# Altium PCB Motion_Board_V2_PCB.PcbDoc (part 2 of 2)
Units mm, origin at the board's own origin, x right, y up, seen from the top; angles counter-clockwise.
Board outline 65.25 x 59.75 mm, 4 copper layers (Top Layer, GND, PWR, Bottom Layer), stack 0.603 mm thick; 136 components, 74 nets, 414 pads, 822 vias.
Unrouted connection lines stored in the file: 41.
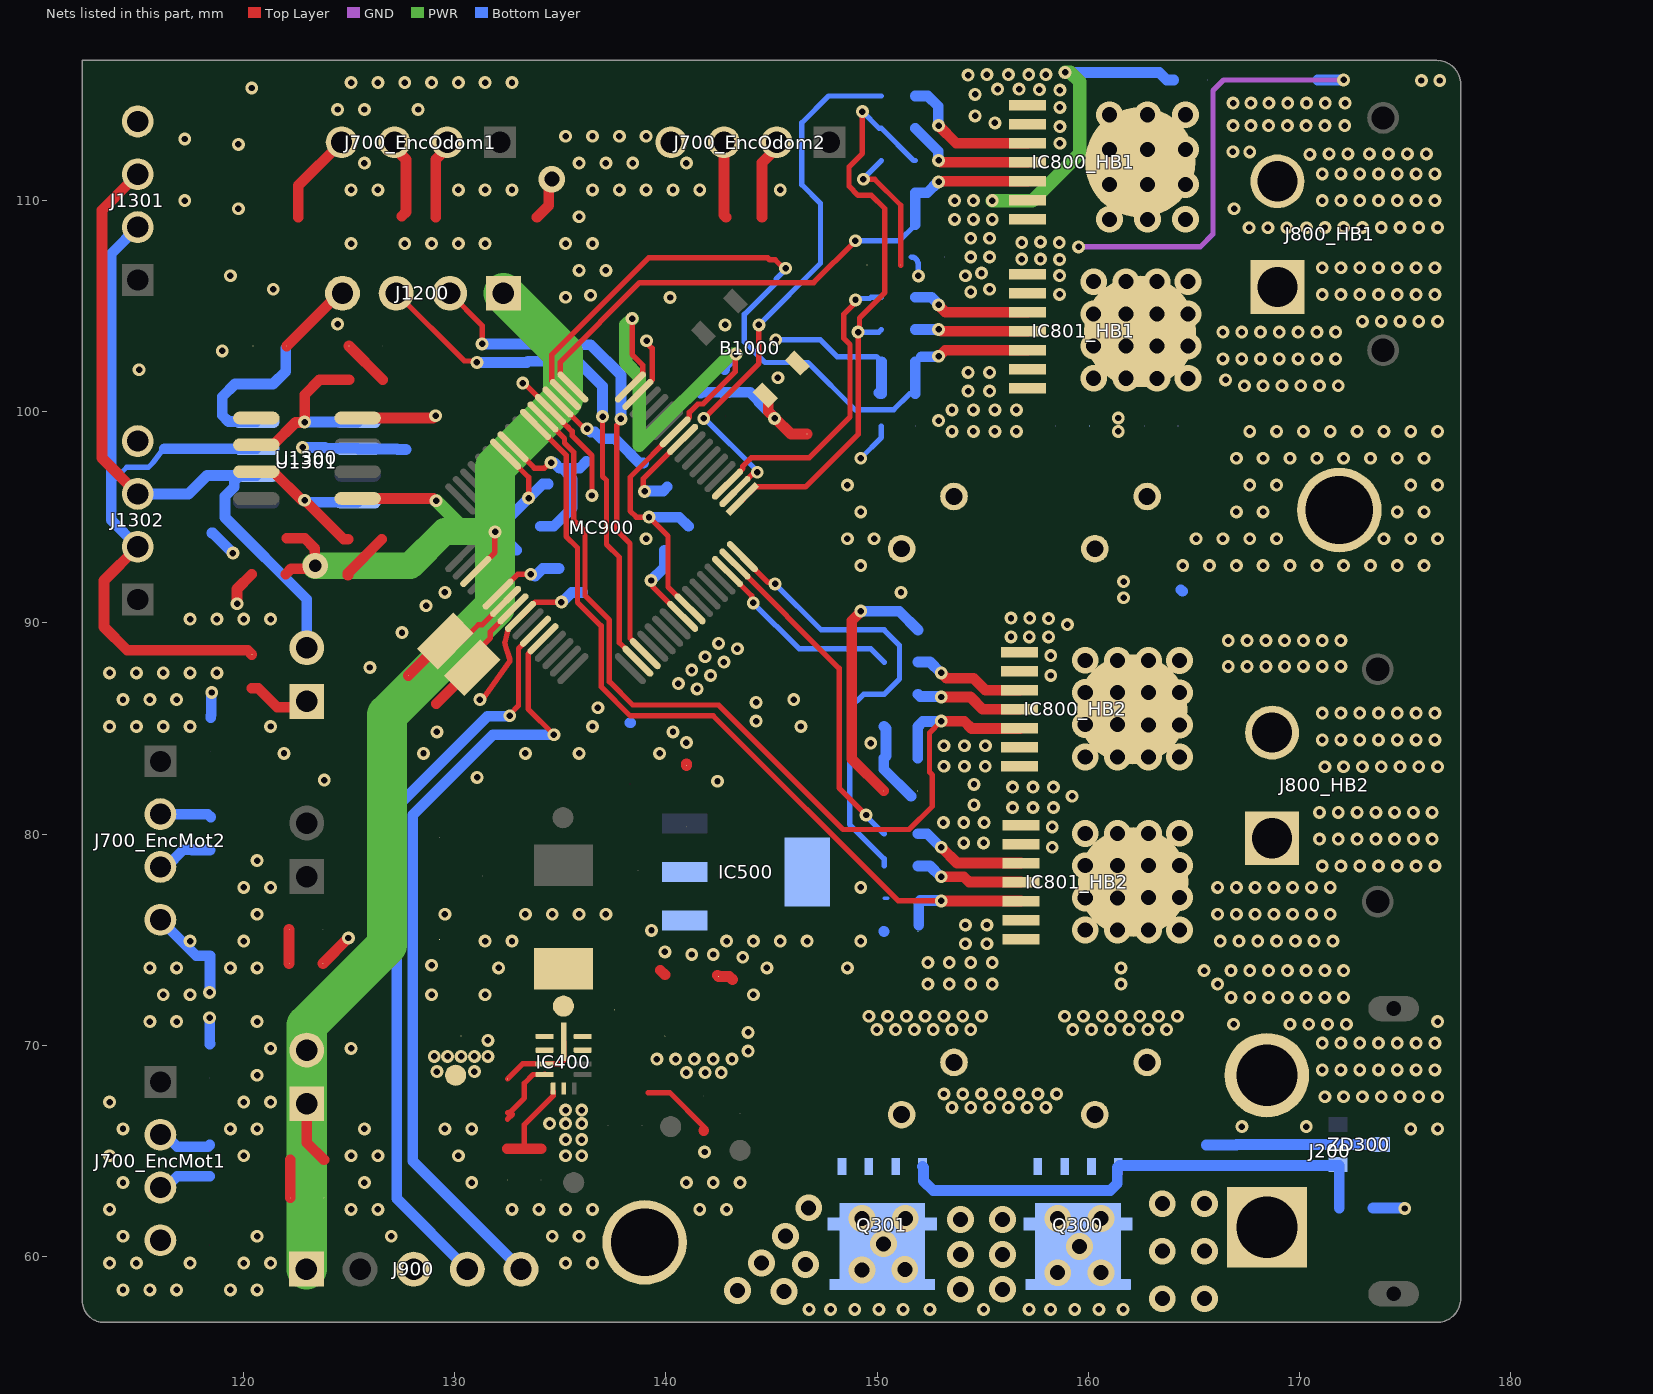
[diagram p4: the nets of this part, all layers, seen from the top]

## Via types
v1: diameter 0.61, hole 0.305, Top Layer to Bottom Layer, tented both sides, 415 vias
v2: diameter 0.61, hole 0.305, Top Layer to Bottom Layer, 281 vias
v3: diameter 1.27, hole 0.711, Top Layer to Bottom Layer, 84 vias
v4: diameter 0.61, hole 0.305, Top Layer to Bottom Layer, tented bottom, 20 vias
v5: diameter 0.61, hole 0.305, Top Layer to Bottom Layer, tented top, 16 vias
v6: diameter 1.27, hole 0.711, Top Layer to Bottom Layer, tented both sides, 5 vias
v7: diameter 1.219, hole 0.61, Top Layer to Bottom Layer, tented both sides, 1 vias

## Nets (pads, with @x,y where several pads share a name; then routed paths per layer and width w, separated by ;. In a path a pad name is that pad's centre, name@x,y a point inside that pad or via, vN(x,y) a via of type N, cw(c..) or ccw(c..) an arc to the next point about the centre after c; other vN are vias at no path point) (continued)
GND: B1000.3 C401.1 C402.1 C403.1 C404.1 C405.1 C406.1 C407.1 C408.1 C409.1 C410.1 C411.1 C413.1 C500.1 C501.2 C802_HB1.1 C802_HB2.1 C803_HB1.1 C803_HB2.1 C804_HB1.1 C804_HB2.1 C805_HB1.1 C805_HB2.1 C806_HB1.1 C806_HB2.1 C807_HB1.1 C807_HB2.1 C808_HB1.2 C808_HB2.2 C809_HB1.2 C809_HB2.2 C900.1 C901.1 C902.1 C903.1 C904.1 C905.1 C1000.1 C1100.2 C1101.2 C1301.1 IC400.1 IC400.6 IC400.11 IC500.1 IC800_HB1.1 IC800_HB1.2 IC800_HB2.1 IC800_HB2.2 IC801_HB1.1 IC801_HB1.2 IC801_HB2.1 IC801_HB2.2 J200.1 J700_EncMot1.4 J700_EncMot2.4 J700_EncOdom1.4 J700_EncOdom2.4 J900.3 J1200.4 LED400.2 LED500.2 LED800_HB1.2 LED800_HB2.2 MC900.9 MC900.15 MC900.20 MC900.25 MC900.41 MC900.56 pad. R300.1 R403.1 R405.1 R702_EncMot1.1 R702_EncMot2.1 R702_EncOdom1.1 R702_EncOdom2.1 R703_EncMot1.1 R703_EncMot2.1 R703_EncOdom1.1 R703_EncOdom2.1 R804_HB1.2 R804_HB2.2 R805_HB1.2 R805_HB2.2 R1305.2 U1300.4 | length 100.6
  Top Layer w0.254: v1(131.191,86.36) 131.297,86.377 131.369,86.45 132.605,88.171 132.605,88.296 132.387,88.968 132.378,89.068 132.538,89.724 MC900.41@133.118,90.304 133.134,90.304 133.807,90.977 v1(135.053,90.977) ; MC900.25@132.765,98.331 133.776,97.319 134.255,97.319 134.516,97.581 v1(134.564,97.581) ; v1(133.223,101.346) 133.285,101.346 MC900.20@134.533,100.099 134.533,100.092 135.374,99.25 135.374,99.243 135.558,99.06 135.558,98.856 136.5,97.915 v1(136.5,96.025) ; MC900.15@138.67,100.806 138.67,100.821 139.35,101.502 139.35,102.99 139.086,103.254 v1(139.086,103.35) ; v1(138.991,96.219) 138.923,96.287 138.923,96.816 MC900.9@140.791,98.684 ; R405.1@139.162,67.75 140.194,67.75 141.787,66.156 R403.1@141.787,66 141.787,65.968 ; v1(139.3,92) 139.368,91.932 139.368,91.727 MC900.56@140.791,90.304
  Top Layer w0.508: v1(119.7,90.9) 119.7,91.6 C1301.1@120.4,92.3 ; R1305.2@122.05,103.1 124.55,105.6 J1200.4@124.69,105.6 ; R703_EncOdom1.1@122.6,109.2 122.6,110.7 J700_EncOdom1.4@124.65,112.75 ; LED400.2@123.763,73.875 124.965,75.078 v1(124.972,75.078) ; U1300.4@125.409,99.696 125.411,99.698 128.97,99.698 129.073,99.8 v1(129.1,99.8) ; R702_EncOdom1.1@133.9,109.2 134.454,109.754 134.454,110.854 v6(134.6,111) ; 139.736,73.55 C402.1@139.954,73.332 ; C409.1@140.97,83.238 140.97,83.322 ; 141.787,65.968 141.795,65.961 ; 142.444,73.308 C401.1@142.494,73.258 143.001,73.258 143.151,73.108
  GND w0.254: v2(159.537,107.798) 165.298,107.798 165.9,108.4 165.9,115.2 166.397,115.697 v1(172.085,115.697)
  Bottom Layer w0.152: R805_HB2.2@150.33,76.962 150.513,76.962
  Bottom Layer w0.254: v1(145.2,103.4) 147.3,103.4 148.1,102.6 149.965,102.6 R805_HB1.2@150.203,102.362 ; v1(149.225,97.79) 150.203,98.768 C807_HB1.1@150.203,99.314 ; C806_HB1.1@151.6,107.315 cw(c151.6,106.969) 151.946,106.969 v1@151.946,106.432
  Bottom Layer w0.508: J700_EncMot2.4@116.068,75.941 117.768,74.241 R703_EncMot2.1@118.418,74.241 118.418,72.518 v1(118.4,72.5) ; v1(118.4,71.3) R702_EncMot1.1@118.4,70.05 118.418,70.068 ; R702_EncMot2.1@118.45,85.5 118.45,85.607 118.481,85.637 118.481,86.681 v1(118.5,86.7) ; C901.1@134.066,94.566 134.697,94.566 C903.1@135.566,95.434 135.566,96.807 135.481,96.891 135.481,96.93 135.092,97.319 ; v1(134.564,97.581) 134.584,97.562 134.721,97.562 134.964,97.319 135.092,97.319 ; v1(135.053,90.977) 135.08,90.977 135.537,91.434 C902.1@136.066,91.434 ; 136.234,97.634 135.919,97.319 135.092,97.319 ; C501.2@138.303,85.27 138.331,85.27 ; v1(138.991,96.219) 139.01,96.239 139.87,96.239 C905.1@140.066,96.434 ; v1(139.3,92) 139.934,92.634 C904.1@139.934,93.434 ; 150.091,100.884 150.137,100.838 C805_HB1.1@150.203,100.838 R805_HB1.2@150.203,102.362 ; 150.318,75.393 C805_HB2.1@150.323,75.387 ; R804_HB2.2@150.33,85.09 150.424,84.996 150.424,83.698 C804_HB2.1@150.317,83.591 150.317,83.071 C807_HB2.1@151.6,81.788 ; C803_HB2.1@164.376,91.567 164.451,91.492 ; C803_HB1.1@170.853,115.697 v1(172.085,115.697) ; R300.1@173.475,62.3 173.906,62.3 173.916,62.29 174.96,62.29 v1@174.975,62.275
  other v1: 114.3,58.42 115.57,58.42 116.84,58.42 119.38,58.42 120.65,58.42 113.665,59.69 114.935,59.69 117.475,59.69 120.015,59.69 121.285,59.69 135.255,59.69 136.525,59.69 114.3,60.96 120.65,60.96 127,60.96 134.62,60.96 135.89,60.96 113.665,62.23 125.095,62.23 126.365,62.23 132.715,62.23 133.985,62.23 135.255,62.23 136.525,62.23 141.605,62.23 142.875,62.23 174.979,62.271 114.3,63.5 125.73,63.5 130.81,63.5 140.97,63.5 142.24,63.5 143.51,63.5 113.665,64.77 120.015,64.77 125.095,64.77 126.365,64.77 130.175,64.77 135.255,64.77 136.017,64.77 141.834,64.948 135.255,65.532 136.017,65.532 114.3,66.04 119.38,66.04 120.65,66.04 125.73,66.04 129.54,66.04 130.81,66.04 175.26,66.04 176.53,66.04 134.493,66.294 135.255,66.294 136.017,66.294 135.255,66.929 136.017,66.929 113.665,67.31 120.015,67.31 121.285,67.31 120.65,68.58 121.285,69.85 125.095,69.85 166.878,70.993 115.57,71.12 116.84,71.12 120.65,71.12 176.53,71.12 166.751,72.263 116.205,72.39 117.475,72.39 128.905,72.39 131.445,72.39 144.145,72.39 115.57,73.66 116.84,73.66 119.38,73.66 120.65,73.66 132.08,73.66 144.78,73.66 148.59,73.66 128.905,73.787 143.637,74.168 141.224,74.295 142.24,74.295 139.954,74.422 117.475,74.93 120.015,74.93 131.445,74.93 132.715,74.93 142.875,74.93 144.145,74.93 145.415,74.93 146.685,74.93 149.225,74.93 139.319,75.438 120.65,76.2 129.54,76.2 133.35,76.2 134.62,76.2 135.89,76.2 137.16,76.2 120.015,77.47 121.285,77.47 149.225,77.47 120.65,78.74 142.443,82.499 123.825,82.55 131.064,82.677 121.92,83.82 128.524,83.82 133.35,83.82 135.89,83.82 139.7,83.82 149.7,84.3 140.97,84.328 129.159,84.836 140.335,84.836 113.665,85.09 114.935,85.09 116.205,85.09 117.475,85.09 121.285,85.09 136.525,85.09 146.389,85.09 136.779,85.979 114.3,86.36 115.57,86.36 116.84,86.36 146.05,86.36 113.665,87.63 114.935,87.63 116.205,87.63 117.475,87.63 118.745,87.63 125.984,87.884 127.508,89.535 117.475,90.17 118.745,90.17 120.015,90.17 121.285,90.17 128.651,90.805 129.54,91.44 151.13,91.44 149.225,92.71 164.465,92.71 165.735,92.71 167.005,92.71 168.275,92.71 169.545,92.71 170.815,92.71 172.085,92.71 173.355,92.71 174.625,92.71 175.895,92.71 139.065,93.98 148.59,93.98 149.86,93.98 165.1,93.98 166.37,93.98 167.64,93.98 168.91,93.98 173.99,93.98 175.26,93.98 176.53,93.98 149.225,95.25 167.005,95.25 168.275,95.25 174.625,95.25 175.895,95.25 148.59,96.52 167.64,96.52 168.91,96.52 175.26,96.52 176.53,96.52 167.005,97.79 168.275,97.79 169.545,97.79 170.815,97.79 172.085,97.79 173.355,97.79 174.625,97.79 175.895,97.79 167.64,99.06 168.91,99.06 170.18,99.06 171.45,99.06 172.72,99.06 173.99,99.06 175.26,99.06 176.53,99.06 145.3,101.6 142.8,104.1 124.46,104.14 135.255,105.41 140.2,105.4 136.433,105.502 151.95,106.425 135.89,106.68 137.16,106.68 125.095,107.95 127.635,107.95 128.905,107.95 130.175,107.95 131.445,107.95 135.255,107.95 136.525,107.95 135.89,109.22 125.095,110.49 126.365,110.49 130.175,110.49 131.445,110.49 132.715,110.49 136.525,110.49 137.795,110.49 139.065,110.49 140.335,110.49 141.605,110.49 145.415,110.49 125.73,111.76 135.89,111.76 137.16,111.76 138.43,111.76 140.97,111.76 135.255,113.03 136.525,113.03 137.795,113.03 139.065,113.03 124.46,114.3 125.73,114.3 128.27,114.3 125.095,115.57 126.365,115.57 127.635,115.57 128.905,115.57 130.175,115.57 131.445,115.57 132.715,115.57
  other v2: 167.264,66.152 170.312,66.152 171.196,67.564 174.752,67.564 175.641,67.564 176.53,67.564 171.069,68.834 171.958,68.834 172.847,68.834 173.736,68.834 174.625,68.834 175.514,68.834 176.403,68.834 171.069,70.104 171.958,70.104 172.847,70.104 173.736,70.104 174.625,70.104 175.514,70.104 176.403,70.104 169.545,70.993 170.434,70.993 171.323,70.993 172.212,70.993 167.64,72.263 168.529,72.263 169.418,72.263 170.307,72.263 171.196,72.263 172.085,72.263 166.116,72.898 165.481,73.533 166.751,73.533 167.64,73.533 168.529,73.533 169.418,73.533 170.307,73.533 171.196,73.533 172.085,73.533 158.293,79.375 158.293,80.34 156.413,81.255 159.233,81.788 156.413,82.22 158.217,87.503 158.217,88.443 156.337,89.332 156.337,90.221 157.226,90.221 158.638,105.547 158.638,106.436 156.845,107.213 156.845,108.001 158.648,112.7 158.648,113.487 155.575,113.665 154.635,113.995 158.648,114.402 154.635,115.011 155.702,115.265 156.718,115.265 154.305,115.926 155.194,115.951 156.21,115.951 157.175,115.951 157.988,115.951
  other v4: 172.085,67.564 172.974,67.564 173.863,67.564 159.004,89.916 158.115,90.195
  other v5: 157.378,81.255 158.344,81.255 157.378,82.22 158.344,82.22 157.201,89.332 158.115,89.332 158.638,107.198 157.734,107.213 158.623,108.001 157.734,108.026 158.649,115.214 157.683,115.24
GND_CAN: C1300.1 C1302.1 J1301.4 J1302.4 R1304.1 R1305.1 U1300.5 U1301.2 | length 6.7
  Top Layer w0.508: U1300.5@120.604,99.7 U1300.5@120.609,99.696
  Bottom Layer w0.254: J1302.4@115,98.6 J1302.4@115.224,98.824
  Bottom Layer w0.508: C1302.1@118.5,94.25 118.55,94.25 v1(119.5,93.3) ; v1(122.8,98.3) 123.867,98.3 123.905,98.262 125.391,98.262 U1301.2@125.409,98.244 125.426,98.227 127.267,98.227 127.294,98.2 C1300.1@127.7,98.2
  other v1: 115.062,101.981 118.999,102.87 121.412,105.791 119.38,106.426 119.761,109.601 117.221,109.982 119.761,112.649 117.221,112.903 120.396,115.316
HBRIN_HB1: C401.2 C402.2 C403.2 C404.2 C405.2 C800_HB1.2 C800_HB2.2 C801_HB1.2 C801_HB2.2 C806_HB1.2 C806_HB2.2 C807_HB1.2 C807_HB2.2 C808_HB1.1 C808_HB2.1 C809_HB1.1 C809_HB2.1 IC400.2 IC400.10 IC800_HB1.6 IC800_HB1.7 IC800_HB2.6 IC800_HB2.7 IC801_HB1.6 IC801_HB1.7 IC801_HB2.6 IC801_HB2.7 Q300.S Q301.S R400.2 TP402.1 ZD300.3 | length 22.9
  PWR w0.635: v2(155.448,109.982) 157.353,109.982 159.588,112.217 159.588,115.612 159.147,116.053 v1(158.902,116.053)
  Bottom Layer w0.508: v1(158.902,116.053) 163.355,116.053 163.711,115.697 C801_HB1.2@164.046,115.697 ; 165.583,65.278 167.005,65.278 167.027,65.3 ZD300.3@173.825,65.3
  other v1: 153.543,67.056 154.432,67.056 155.321,67.056 156.21,67.056 157.099,67.056 157.988,67.056 153.162,67.691 154.051,67.691 154.94,67.691 155.829,67.691 156.718,67.691 157.607,67.691 158.496,67.691 140.97,68.707 141.859,68.707 142.621,68.707 129.159,68.751 130.937,68.751 139.573,69.342 140.462,69.342 141.351,69.342 142.24,69.342 143.129,69.342 129.032,69.469 129.667,69.469 130.302,69.469 130.937,69.469 131.572,69.469 143.891,69.723 131.572,70.231 143.891,70.612 149.987,70.739 150.876,70.739 151.765,70.739 152.654,70.739 153.543,70.739 154.432,70.739 159.258,70.739 160.147,70.739 161.036,70.739 161.925,70.739 162.814,70.739 163.703,70.739 149.606,71.374 150.495,71.374 151.384,71.374 152.273,71.374 153.162,71.374 154.051,71.374 154.94,71.374 158.877,71.374 159.766,71.374 160.655,71.374 161.544,71.374 162.433,71.374 163.322,71.374 164.211,71.374 153.543,99.06 154.559,99.06 155.575,99.06 156.591,99.06
  other v2: 152.4,72.898 153.416,72.898 154.432,72.898 155.448,72.898 153.416,73.914 154.432,73.914 155.448,73.914 154.178,74.803 155.194,74.803 154.178,75.692 155.194,75.692 154.102,79.578 155.042,79.578 153.162,83.21 155.118,83.21 154.127,84.176 155.123,84.181 152.908,99.568 153.543,100.076 154.559,100.076 155.575,100.076 156.591,100.076 154.305,100.965 155.321,100.965 154.305,101.854 155.321,101.854 154.432,105.664 155.321,105.791 154.94,106.553 155.321,107.315 155.321,108.204 153.67,109.093 154.559,109.093 155.448,109.093 153.67,109.982 154.559,109.982
  other v4: 152.4,73.914 153.137,80.543 154.102,80.543 154.584,81.382 154.584,82.347 154.127,83.21 153.162,84.176 154.178,106.426 154.432,107.315 154.432,108.204
  other v5: 155.067,80.543
INA1: MC900.2 R800_HB1.2 | length 26
  Top Layer w0.254: v1(141.794,99.674) 144.4,102.28 v1(144.4,104.1) ; MC900.2@143.266,96.209 143.282,96.209 144.13,97.057 144.257,97.057 v1(144.325,97.125)
  Bottom Layer w0.254: v1(141.794,99.674) 141.827,99.674 144.325,97.176 v1(144.325,97.125) ; v1(144.4,104.1) 147.32,107.02 147.32,109.855 146.431,110.744 146.431,113.665 147.701,114.935 R800_HB1.2@150.203,114.935
INA2: MC900.62 R800_HB2.2 | length 9.3
  Top Layer w0.254: MC900.62@142.912,92.426 144.066,91.273 144.066,91.01 v1(144.134,90.942)
  Bottom Layer w0.254: v1(144.134,90.942) 146.302,88.773 149.695,88.773 R800_HB2.2@150.33,88.138
INB1: MC900.3 R801_HB1.2 | length 14.4
  Top Layer w0.254: MC900.3@142.912,96.563 142.912,96.579 143.642,97.309 143.642,97.412 144.044,97.814 146.788,97.814 148.717,99.743 148.717,103.17 148.412,103.475 148.412,104.597 148.971,105.156 148.971,105.278 v1(148.976,105.283)
  Bottom Layer w0.254: v1(148.976,105.283) 149.044,105.351 149.648,105.351 149.707,105.41 R801_HB1.2@150.203,105.41
INB2: MC900.63 R801_HB2.2 | length 15.7
  Top Layer w0.254: MC900.63@143.266,92.779 148.2,87.845 148.2,82.178 v1(149.479,80.899)
  Bottom Layer w0.254: v1(149.479,80.899) 149.479,80.861 R801_HB2.2@150.33,80.01
INH1: MC900.1 R802_HB1.2 R803_HB1.2 R806_HB1.1 | length 28.5
  Top Layer w0.254: MC900.1@143.62,95.856 143.661,95.856 144.242,96.437 146.612,96.437 149.098,98.923 v1(149.098,103.759) 149.166,103.827 149.166,104.431 150.368,105.633 150.368,109.601 149.733,110.236 149.098,110.236 148.666,110.668 148.666,111.582 149.3,112.216 v4(149.3,114.2)
  Bottom Layer w0.254: v1(149.098,103.759) 150.076,103.759 R803_HB1.2@150.203,103.886 ; v4(149.3,114.2) 150.089,113.411 R802_HB1.2@150.203,113.411 151.727,111.887 R806_HB1.1@151.803,111.887
INH2: MC900.64 R802_HB2.2 R803_HB2.2 R806_HB2.1 | length 21.9
  Top Layer w0.254: MC900.64@143.62,93.133 144.84,91.912 145.103,91.912 v1(145.171,91.844)
  Bottom Layer w0.254: v1(145.171,91.844) 147.353,89.662 R806_HB2.1@150.33,89.662 151.059,88.933 151.059,87.343 R802_HB2.2@150.33,86.614 149.352,86.614 148.7,85.962 148.7,80.455 150.33,78.825 R803_HB2.2@150.33,78.486
ISA1: C804_HB1.2 IC800_HB1.5 MC900.17 R804_HB1.1 | length 28
  Top Layer w0.254: MC900.17@135.593,101.159 135.001,101.751 135.001,102.275 135.001,102.345 138.757,106.1 146.994,106.1 148.971,108.077 v1(148.971,108.082)
  Top Layer w0.508: v1(152.908,110.871) 152.937,110.9 IC800_HB1.5@157.129,110.9
  Bottom Layer w0.254: v1(148.971,108.082) 148.976,108.077 151.041,108.077 C804_HB1.2@151.803,108.839
  Bottom Layer w0.508: C804_HB1.2@151.803,108.839 R804_HB1.1@151.803,110.363 152.373,110.363 152.881,110.871 v1(152.908,110.871)
ISA2: C804_HB2.2 IC800_HB2.5 MC900.21 R804_HB2.1 | length 43.4
  Top Layer w0.254: MC900.21@134.179,99.745 135.203,98.721 135.203,98.517 135.636,98.084 135.636,94.867 136.17,94.334 136.17,91.286 137.325,90.131 137.325,87.211 138.43,86.106 142.494,86.106 148.387,80.213 151.513,80.213 152.615,81.315 152.615,82.788 152.476,82.926 152.476,84.785 v1(153.035,85.344)
  Top Layer w0.508: v1(153.035,85.344) 154.119,85.344 154.463,85 IC800_HB2.5@156.75,85
  Bottom Layer w0.508: C804_HB2.2@151.917,83.591 151.917,85.077 R804_HB2.1@151.93,85.09 152.165,85.325 153.016,85.325 v1(153.035,85.344)
ISB1: C805_HB1.2 IC801_HB1.5 MC900.18 R805_HB1.1 | length 36
  Top Layer w0.254: MC900.18@135.24,100.806 135.24,100.821 134.598,101.463 134.598,102.698 139.178,107.278 144.817,107.278 144.914,107.181 145.178,107.181 145.573,106.786 v1(145.669,106.786)
  Top Layer w0.508: v1(152.908,102.616) 152.935,102.616 153.219,102.9 IC801_HB1.5@157.129,102.9
  Bottom Layer w0.254: v1(145.669,106.786) 145.669,106.733 145.211,106.274 145.211,106.095 143.714,104.598 143.714,103.306 144.7,102.32 146.727,102.32 148.963,100.084 150.783,100.084 151.537,100.838 C805_HB1.2@151.803,100.838
  Bottom Layer w0.508: C805_HB1.2@151.803,100.838 R805_HB1.1@151.803,102.362 ; 152.099,102.597 152.889,102.597 v1(152.908,102.616)
ISB2: C805_HB2.2 IC801_HB2.5 MC900.22 R805_HB2.1 | length 40
  Top Layer w0.254: MC900.22@133.825,99.391 135.28,97.936 135.28,94.087 135.814,93.553 135.814,90.97 136.931,89.853 136.931,86.975 138.308,85.598 142.24,85.598 151.003,76.835 v1(153.035,76.835)
  Top Layer w0.508: v1(153.035,76.835) 153.045,76.825 IC801_HB2.5@156.8,76.825
  Bottom Layer w0.508: 151.968,75.692 151.968,76.785 152.038,76.854 153.016,76.854 v1(153.035,76.835)
LED3v3: C500.2 C900.2 C901.2 C902.2 C903.2 C904.2 C905.2 C1301.2 IC500.2 IC500.4 J500.1 J500.2 J900.1 J1200.1 MC900.10 MC900.16 MC900.19 MC900.26 MC900.35 MC900.38 MC900.57 R500.2 R1000.2 R1302.1 U1300.1 | length 127.4
  Top Layer w0.254: MC900.35@130.997,92.426 131.9,93.329 131.9,94.289 v1(131.911,94.3) ; MC900.38@132.058,91.365 132.993,92.3 v1(133.6,92.3) ; MC900.26@132.411,97.977 133.5,96.888 v1(133.5,95.9) ; MC900.19@134.886,100.452 136.083,99.255 136.199,99.255 v1(136.267,99.187) ; MC900.16@138.316,101.159 138.316,101.186 138.897,101.767 138.897,102.203 138.4,102.7 v1(138.4,104.4) ; MC900.10@140.438,99.022 138.305,96.889 138.305,95.295 138.6,95 v1(139.2,95) 140.1,94.1 140.1,91.703 MC900.57@141.145,90.658 ; MC900.10@140.438,99.038 140.438,99.054 141.108,99.725 141.108,99.958 141.51,100.36 141.76,100.36 143.281,101.882 143.281,102.681 v1(143.315,102.715)
  Top Layer w0.508: C1301.2@122,92.3 122.264,92.564 123.264,92.564 v7(123.4,92.7) 123.381,92.719 123.381,93.519 122.9,94 R1302.1@122.05,94 ; J500.1@123,67.23 123,65.388 R500.2@123.813,64.575 ; U1300.1@125.409,95.886 128.987,95.886 129.075,95.797 v1@129.103,95.797
  PWR w0.635: v1(129.122,95.778) 130.58,94.32 130.6,94.3 ; v1@131.891,94.32 v1(131.911,94.3) ; v1(138.4,104.4) 138.1,104.1 138.1,102.3 138.746,101.654 138.746,98.396 143.065,102.715 v1(143.315,102.715)
  PWR w1.27: v7(123.4,92.7) 127.9,92.7 129.52,94.32 130.58,94.32 v1@131.891,94.32
  PWR w1.905: J900.1@122.98,59.4 123,59.42 J500.1@123,67.23 J500.2@123,69.77 123,70.95 126.8,74.749 126.8,85.652 131.911,90.763 v1(131.911,94.3) 131.911,97.367 135.128,100.584 135.128,102.782 J1200.1@132.31,105.6
  Bottom Layer w0.508: v1(131.911,94.3) 131.911,94.311 v1(133.5,95.9) 134.166,96.566 C903.2@134.434,96.566 ; v1@132.154,94.215 C901.2@132.934,93.434 ; v1@133.8,92.2 134.166,92.566 C902.2@134.934,92.566 ; v1(136.267,99.187) 136.295,99.187 136.445,99.037 136.628,99.037 136.952,98.713 137.595,98.713 138.333,97.975 138.361,97.975 ; 138.325,97.975 138.734,97.566 C905.2@138.934,97.566 ; v1(139.2,95) 140.631,95 C904.2@141.066,94.566 ; R1000.2@142.785,101.996 142.785,102.158 143.315,102.688 v1(143.315,102.715)
  other v1: 144.272,85.344 144.272,86.233 141.478,86.868 140.589,87.122 142.113,87.503 141.224,87.757 142.748,88.138 141.859,88.392 143.383,88.773 142.494,89.027
MOTOR1_HB1: C801_HB1.1 C803_HB1.2 IC800_HB1.8 J800_HB1.N
  other v2: 167.611,108.7 168.5,108.7 169.389,108.7 170.329,108.7 171.196,108.712 172.085,108.712 172.974,108.712 173.863,108.712 174.752,108.712 175.641,108.712 176.53,108.712 166.9,109.6 171.069,109.982 171.958,109.982 172.847,109.982 173.736,109.982 174.625,109.982 175.514,109.982 176.403,109.982 171.069,111.252 171.958,111.252 172.847,111.252 173.736,111.252 174.625,111.252 175.514,111.252 176.403,111.252 170.486,112.175 171.4,112.2 172.289,112.2 173.3,112.2 174.2,112.2 175.1,112.2 176,112.2 166.84,112.3 167.64,112.293 166.853,113.538 167.691,113.538 168.529,113.538 169.418,113.538 170.307,113.538 171.196,113.538 172.136,113.538 166.853,114.605 167.691,114.605 168.547,114.6 169.436,114.6 170.325,114.6 171.214,114.6 172.154,114.6 175.768,115.672 176.632,115.672
  other v3: 161,109.1 162.8,109.1 164.6,109.1 161,110.75 162.8,110.75 164.6,110.75 161,112.4 162.8,112.4 164.6,112.4 161,114.05 162.8,114.05 164.6,114.05
MOTOR1_HB2: C801_HB2.1 C803_HB2.2 IC800_HB2.8 J800_HB2.N
  other v2: 171.196,83.185 172.085,83.185 172.974,83.185 173.863,83.185 174.752,83.185 175.641,83.185 176.53,83.185 171.069,84.455 171.958,84.455 172.847,84.455 173.736,84.455 174.625,84.455 175.514,84.455 176.403,84.455 171.069,85.725 171.958,85.725 172.847,85.725 173.736,85.725 174.625,85.725 175.514,85.725 176.403,85.725 166.624,87.935 167.513,87.935 168.402,87.935 169.291,87.935 170.18,87.935 171.069,87.935 171.958,87.935 166.624,89.154 167.513,89.154 168.402,89.154 169.291,89.154 170.18,89.154 171.069,89.154 171.958,89.154
  other v3: 159.852,83.652 161.376,83.652 162.839,83.642 164.313,83.642 159.852,85.176 161.376,85.176 162.839,85.166 164.313,85.166 159.852,86.7 161.376,86.7 162.839,86.69 164.313,86.69 159.852,88.224 161.376,88.224 162.839,88.214 164.313,88.214
  other v4: 161.671,91.186 161.671,91.948
MOTOR2_HB1: C800_HB1.1 C802_HB1.2 IC801_HB1.8 J800_HB1.P
  other v1: 161.417,99.06 161.417,99.695
  other v2: 167.386,101.219 168.275,101.219 169.164,101.219 170.053,101.219 170.942,101.219 171.831,101.219 166.5,101.5 167.259,102.489 168.148,102.489 169.037,102.489 169.926,102.489 170.815,102.489 171.704,102.489 167.259,103.759 168.148,103.759 169.037,103.759 169.926,103.759 170.815,103.759 171.704,103.759 172.974,104.267 173.863,104.267 174.752,104.267 175.641,104.267 176.53,104.267 171.069,105.537 171.958,105.537 172.847,105.537 173.736,105.537 174.625,105.537 175.514,105.537 176.403,105.537 171.069,106.807 171.958,106.807 172.847,106.807 173.736,106.807 174.625,106.807 175.514,106.807 176.403,106.807
  other v3: 160.252,101.576 161.776,101.576 163.246,101.575 164.719,101.575 160.252,103.1 161.776,103.1 163.246,103.099 164.719,103.099 160.252,104.624 161.776,104.624 163.246,104.623 164.719,104.623 160.252,106.148 161.776,106.148 163.246,106.147 164.719,106.147
  other v5: 166.37,102.489 166.37,103.759
MOTOR2_HB2: C800_HB2.1 C802_HB2.2 IC801_HB2.8 J800_HB2.P
  other v2: 166.243,74.93 167.132,74.93 168.021,74.93 168.91,74.93 169.799,74.93 170.688,74.93 171.577,74.93 166.116,76.2 167.005,76.2 167.894,76.2 168.783,76.2 169.672,76.2 170.561,76.2 171.45,76.2 167.005,77.47 167.894,77.47 168.783,77.47 169.672,77.47 170.561,77.47 171.45,77.47 171.069,78.486 171.958,78.486 172.847,78.486 173.736,78.486 174.625,78.486 175.514,78.486 176.403,78.486 170.942,79.756 171.831,79.756 172.72,79.756 173.609,79.756 174.498,79.756 175.387,79.756 176.276,79.756 170.942,81.026 171.831,81.026 172.72,81.026 173.609,81.026 174.498,81.026 175.387,81.026 176.276,81.026
  other v3: 159.852,75.452 161.376,75.452 162.839,75.463 164.313,75.463 159.852,76.976 161.376,76.976 162.839,76.987 164.313,76.987 159.852,78.5 161.376,78.5 162.839,78.511 164.313,78.511 159.852,80.024 161.376,80.024 162.839,80.035 164.313,80.035
  other v4: 161.544,72.898 161.544,73.66
  other v5: 166.116,77.47
NetB1000_1: B1000.1 C1000.2 R1000.1 R1001.2 | length 7.2
  Top Layer w0.508: B1000.1@144.707,100.773 144.707,100.672 144.849,100.531 144.849,100.004 145.15,99.702 v1(145.15,99.675) 145.177,99.675 145.918,98.934 C1000.2@146.684,98.934
  Bottom Layer w0.508: R1000.1@141.654,100.864 141.705,100.916 142.618,100.916 142.634,100.9 142.971,100.9 142.987,100.916 143.984,100.916 144.412,100.488 144.412,100.44 145.15,99.702 v1(145.15,99.675)
NetC400_1: C400.1 IC400.4 | length 3.2
  Top Layer w0.254: 132.5,66.5 132.729,66.729 ; C400.1@132.5,66.8 ccw(c132.5,67.041) 132.671,66.871 133.3,67.5 133.3,68.2 133.717,68.617 134.26,68.617 IC400.4@134.262,68.619
NetIC800_HB1_3: IC800_HB1.3 R800_HB1.1 | length 6.8
  Top Layer w0.508: v1(152.908,113.538) 153.746,112.7 IC800_HB1.3@157.129,112.7
  Bottom Layer w0.508: R800_HB1.1@151.803,114.935 152.4,114.935 152.889,114.446 152.889,113.557 v1(152.908,113.538)
NetIC800_HB1_4: IC800_HB1.4 R802_HB1.1 | length 6.2
  Top Layer w0.508: v1(152.908,111.887) 152.995,111.8 IC800_HB1.4@157.129,111.8
  Bottom Layer w0.508: R802_HB1.1@151.803,113.411 152.889,112.325 152.889,111.906 v1(152.908,111.887)
NetIC800_HB2_3: IC800_HB2.3 R800_HB2.1 | length 5.4
  Top Layer w0.508: v1(153.035,87.63) 153.289,87.376 154.559,87.376 155.135,86.8 IC800_HB2.3@156.75,86.8
  Bottom Layer w0.508: R800_HB2.1@151.93,88.138 152.5,88.138 153.008,87.63 v1(153.035,87.63)
NetIC800_HB2_4: IC800_HB2.4 R802_HB2.1 | length 5.1
  Top Layer w0.508: v1(153.035,86.487) 154.416,86.487 155.002,85.9 IC800_HB2.4@156.75,85.9
  Bottom Layer w0.508: R802_HB2.1@151.93,86.614 152.038,86.506 153.016,86.506 v1(153.035,86.487)
NetIC801_HB1_3: IC801_HB1.3 R801_HB1.1 | length 5.6
  Top Layer w0.508: v1(152.908,105.049) 152.908,105.029 153.237,104.7 IC801_HB1.3@157.129,104.7
  Bottom Layer w0.508: R801_HB1.1@151.803,105.41 152.574,105.41 152.908,105.076 v1(152.908,105.049)
NetIC801_HB1_4: IC801_HB1.4 R803_HB1.1 | length 5.4
  Top Layer w0.508: v1(152.908,103.886) 152.935,103.886 153.021,103.8 IC801_HB1.4@157.129,103.8
  Bottom Layer w0.508: R803_HB1.1@151.803,103.886 v1(152.908,103.886)
NetIC801_HB2_3: IC801_HB2.3 R801_HB2.1 | length 5.4
  Top Layer w0.508: v1@153.054,79.356 153.785,78.625 IC801_HB2.3@156.8,78.625
  Bottom Layer w0.508: R801_HB2.1@151.93,80.01 152.373,80.01 153.008,79.375 v1(153.035,79.375)
NetIC801_HB2_4: IC801_HB2.4 R803_HB2.1 | length 5.2
  Top Layer w0.508: v1(153.035,77.978) 154.103,77.978 154.356,77.725 IC801_HB2.4@156.8,77.725
  Bottom Layer w0.508: R803_HB2.1@151.93,78.486 152.5,78.486 153.008,77.978 v1(153.035,77.978)
NetJ200_2: J200.2 Q300.D Q301.D
  other v2: 146.782,57.492 147.798,57.492 148.941,57.492 150.084,57.492 151.227,57.492 152.497,57.492 155.037,57.492 157.196,57.492 158.212,57.492 159.355,57.492 160.498,57.492 161.641,57.492
  other v3: 165.5,58 145.593,58.344 143.39,58.384 153.949,58.445 155.931,58.445 158.547,59.233 160.604,59.233 149.276,59.36 151.308,59.385 146.609,59.614 144.526,59.69 153.949,60.096 155.931,60.096 159.577,60.472 150.306,60.599 145.669,60.96 153.949,61.747 155.931,61.747 149.276,61.798 151.333,61.798 158.547,61.798 160.604,61.798 146.761,62.306 165.5,62.5
  other v6: 163.5,58 163.5,60.25 165.5,60.25 163.5,62.5
NetJ700_EncMot1_2: J700_EncMot1.2 R700_EncMot1.2 | length 2.6
  Bottom Layer w0.508: J700_EncMot1.2@116.068,65.766 116.3,65.766 116.866,65.2 118.325,65.2 R700_EncMot1.2@118.4,65.275
NetJ700_EncMot1_3: J700_EncMot1.3 R701_EncMot1.2 | length 2.6
  Bottom Layer w0.508: J700_EncMot1.3@116.068,63.266 116.332,63.266 116.866,63.8 118.4,63.8
NetJ700_EncMot2_2: J700_EncMot2.2 R700_EncMot2.2 | length 2.4
  Bottom Layer w0.508: J700_EncMot2.2@116.068,80.941 118.309,80.941 R700_EncMot2.2@118.45,80.8
NetJ700_EncMot2_3: J700_EncMot2.3 R701_EncMot2.2 | length 2.7
  Bottom Layer w0.508: J700_EncMot2.3@116.068,78.441 116.339,78.441 117.147,79.25 117.575,79.25 117.584,79.241 R701_EncMot2.2@118.418,79.241
NetJ700_EncOdom1_2: J700_EncOdom1.2 R700_EncOdom1.2 | length 3.8
  Top Layer w0.508: R700_EncOdom1.2@129.1,109.2 129.1,111.929 129.65,112.479 J700_EncOdom1.2@129.65,112.75
NetJ700_EncOdom1_3: J700_EncOdom1.3 R701_EncOdom1.2 | length 3.8
  Top Layer w0.508: J700_EncOdom1.3@127.15,112.75 127.15,112.479 127.7,111.929 127.7,109.45 127.5,109.25
NetJ700_EncOdom2_2: J700_EncOdom2.2 R700_EncOdom2.2 | length 3.8
  Top Layer w0.508: R700_EncOdom2.2@144.55,109.2 144.55,111.779 145.25,112.479 J700_EncOdom2.2@145.25,112.75
NetJ700_EncOdom2_3: J700_EncOdom2.3 R701_EncOdom2.2 | length 3.6
  Top Layer w0.508: J700_EncOdom2.3@142.75,112.75 142.75,109.3 R701_EncOdom2.2@142.85,109.2
NetJ1300_1: J1300.1 R1303.2 | length 3.1
  Top Layer w0.508: R1303.2@120.4,86.9 120.7,86.9 121.6,86 122.72,86 J1300.1@123,86.28
NetJ1300_2: J1300.2 J1301.3 J1302.3 U1301.6 | length 33.3
  Top Layer w0.508: J1302.3@115,96.1 113.3,97.8 113.3,109.532 J1301.3@115,111.232
  Bottom Layer w0.508: J1302.3@115,96.1 117.4,96.1 118.274,96.974 U1301.6@120.609,96.974 119.834,96.974 119.571,96.711 119.571,96.429 119.128,95.986 119.128,94.987 123,91.114 J1300.2@123,88.82
NetJ1301_2: J1301.2 J1302.2 R1303.1 U1301.7 | length 36
  Top Layer w0.508: J1302.2@114.809,93.791 J1302.2@115,93.6 113.4,92 113.4,89.8 114.5,88.7 120.2,88.7 R1303.1@120.4,88.5
  Bottom Layer w0.254: 113.738,96.623 114.477,97.362 115.498,97.362 115.73,97.594 115.756,97.625 116.149,98.169 116.163,98.183 116.224,98.244 116.262,98.244
  Bottom Layer w0.508: J1302.2@115,93.6 113.738,94.862 113.738,96.623 113.738,107.47 J1301.2@115,108.732 ; 116.262,98.244 U1301.7@120.609,98.244
NetLED400_1: LED400.1 R402.1 | length 1.6
  Top Layer w0.508: LED400.1@122.163,73.875 R402.1@122.163,75.475
NetLED500_1: LED500.1 R500.1 | length 1.8
  Top Layer w0.508: LED500.1@122.213,62.775 R500.1@122.213,64.575
NetLED800_HB1_1: LED800_HB1.1 R806_HB1.2 | length 6.3
  Top Layer w0.254: v1(149.352,110.998) 149.885,110.998 151.118,109.765 LED800_HB1.1@151.118,106.934
  Bottom Layer w0.254: v1(149.352,110.998) 149.352,111.036 R806_HB1.2@150.203,111.887
NetLED800_HB2_1: LED800_HB2.1 R806_HB2.2 | length 12.4
  Top Layer w0.508: v1(149.225,90.551) 149.225,90.524 148.8,90.099 148.8,83.553 LED800_HB2.1@150.311,82.042
  Bottom Layer w0.508: v1(149.225,90.551) 151.041,90.551 R806_HB2.2@151.93,89.662
NetQ300_G: Q300.G Q301.G R300.2 ZD300.1 | length 23.5
  Bottom Layer w0.508: Q301.G@152.146,64.259 152.195,64.21 152.195,63.578 152.654,63.119 161.036,63.119 161.368,63.451 161.368,64.21 Q300.G@161.417,64.259 161.462,64.305 171.87,64.305 171.875,64.3 R300.2@171.875,62.3
NetR1300_1: R1300.1 TXCAN.1 | length 2.3
  Top Layer w0.508: R1300.1@125,103.1 TXCAN.1@126.6,101.5
NetR1301_1: R1301.1 RXCAN.1 | length 2.4
  Top Layer w0.508: R1301.1@124.95,92.25 124.95,92.35 RXCAN.1@126.55,93.95
NetR1304_2: R1304.2 U1301.8 | length 7.2
  Bottom Layer w0.508: U1301.8@120.609,99.514 120.591,99.532 119.298,99.532 119,99.83 119,100.7 119.6,101.3 121.4,101.3 122,101.9 R1304.2@122,103
NetRXCAN1300_2: RXCAN.2 U1300.7 U1301.4 | length 8.2
  Top Layer w0.508: U1300.7@120.609,97.156 121.409,97.156 122.745,95.819 122.881,95.819 124.75,93.95 RXCAN.2@124.95,93.95
  Bottom Layer w0.508: v1(122.9,95.8) 122.927,95.8 123.023,95.704 U1301.4@125.409,95.704
NetTXCAN1300_2: TXCAN.2 U1300.6 U1301.1 | length 8.9
  Top Layer w0.508: U1300.6@120.609,98.426 121.409,98.426 122.464,99.481 122.881,99.481 v1(122.9,99.5) 122.9,100.8 123.6,101.5 TXCAN.2@125,101.5
  Bottom Layer w0.508: v1(122.9,99.5) 122.907,99.507 125.402,99.507 U1301.1@125.409,99.514
OSC1_9: C1100.1 MC900.39 Y1100.1 | length 6.7
  Top Layer w0.254: Y1100.1@129.564,89.797 Y1100.1@129.564,89.136 130.353,89.136 131.116,89.9 131.3,89.9 MC900.39@132.411,91.012
  Top Layer w0.508: C1100.1@127.8,87.5 129.436,89.136 Y1100.1@129.564,89.136
OSC2_9: C1101.1 MC900.40 Y1100.2 | length 5.8
  Top Layer w0.254: Y1100.2@130.836,88.096 130.836,88.436 131.688,89.288 131.688,89.581 MC900.40@132.765,90.658
  Top Layer w0.508: C1101.1@129.134,86.166 130.832,87.864 Y1100.2@130.836,87.864
PGC_9: J900.5 MC900.44 | length 37.2
  Top Layer w0.254: MC900.44@134.179,89.244 134.179,89.228 133.475,88.524 133.475,85.925 v1(134.7,84.7)
  Bottom Layer w0.508: J900.5@133.14,59.4 128.016,64.524 128.016,80.899 131.817,84.7 v1(134.7,84.7)
PGD_9: J900.4 MC900.43 | length 34.9
  Top Layer w0.254: v1(132.607,85.598) 132.607,85.656 133.025,86.075 133.025,88.781 133.825,89.581 MC900.43@133.825,89.597
  Bottom Layer w0.508: J900.4@130.6,59.4 127.254,62.746 127.254,81.28 131.553,85.579 132.587,85.579 v1(132.607,85.598)
SW_4: C400.2 IC400.3 IC400.12 L400.1 TP401.1 | length 3.6
  Top Layer w0.254: C400.2@132.5,68.4 133.219,69.119 IC400.3@133.964,69.119 ; IC400.3@134.262,69.119 134.892,69.119 ccw(c134.892,69.395) 135.087,69.2 ccw(c134.906,69.381) 135.162,69.381 IC400.12@135.162,70.169
UART_RX: J1200.2 MC900.51 | length 24
  Top Layer w0.254: J1200.2@129.77,105.6 131.3,104.07 v1(131.3,103.2) ; v1(137.87,99.652) 137.87,99.556 137.675,99.361 137.675,94.368 138.3,93.743 138.3,89.276 139.023,88.552 MC900.51@139.023,88.537
  Bottom Layer w0.508: v1(131.3,103.2) 135.719,103.2 135.752,103.167 136.433,103.167 137.87,101.73 v1(137.87,99.652)
UART_TX: J1200.3 MC900.50 | length 25.3
  Top Layer w0.254: J1200.3@127.23,105.6 127.252,105.6 130.459,102.393 130.982,102.393 v1(131.05,102.325) ; v1(137.001,99.759) 137.001,96.931 137.186,96.746 137.186,93.714 137.792,93.108 137.792,89.061 MC900.50@138.67,88.183
  Bottom Layer w0.508: v1(131.05,102.325) 133.419,102.325 133.476,102.383 135.817,102.383 137.001,101.199 v1(137.001,99.759)
VCC_4: C413.2 IC400.5 R404.2 | length 4.9
  Top Layer w0.254: 133.3,65.1 133.3,66.244 134.662,67.606 IC400.5@134.662,67.803
  Top Layer w0.508: 132.487,65.1 133.3,65.1 134.087,65.1
pads on no net: B1000.2 B1000.4 J200.S1 J200.S2 J800_HB1.S1 J800_HB1.S2 J800_HB2.S1 J800_HB2.S2 MC900.4 MC900.5 MC900.6 MC900.8 MC900.23 MC900.24 MC900.27 MC900.28 MC900.29 MC900.32 MC900.33 MC900.34 MC900.36 MC900.37 MC900.42 MC900.49 MC900.52 MC900.53 MC900.54 MC900.55 MC900.58 MC900.59 MC900.60 MC900.61 U1301.5 ZD300.2

## Polygon pours and split planes (outlines as drawn)
GND on Top Layer "GND_L01_P105" (solid, remove dead copper, pour order 105): 123.825,116.967 177.038,116.967 177.927,116.078 177.546,115.697 177.546,57.023 112.141,57.023 112.268,57.15 112.268,91.815 123.825,91.815
HBRIN_HB1 on Top Layer "HBRIN_HB1_L01_P060" (solid, pour order 60): 151.384,74.676 153.416,74.676 153.67,74.93 153.67,75.946 153.924,76.2 158.115,76.2 158.115,74.168 158.496,73.787 159.385,73.787 159.512,73.66 159.512,72.39 160.02,72.39 160.274,72.136 164.973,72.136 165.481,71.628 165.735,71.628 165.989,71.374 165.989,65.786 164.465,64.262 156.827,64.262 147.447,64.262 146.431,65.278 146.431,71.12 147.447,72.136 150.622,72.136 150.622,73.914
MOTOR1_HB1 on Top Layer "MOTOR1_HB1_L01_P085" (solid, pour order 85): 159.4,115.848 160.519,116.967 177.038,116.967 177.927,116.078 177.927,107.95 158.877,107.95 159.4,108.473
GND on Top Layer "GND_L01_P084" (solid, pour order 84): 158.115,112.395 158.369,112.141 159.258,112.141 159.554,112.437 159.554,115.104 160.147,115.697 160.147,116.713 154.178,116.713 153.67,116.205 153.67,113.538 154.051,113.157 157.988,113.157 158.115,113.03
GND on Top Layer "GND_L01_P069" (solid, pour order 69): 156.083,90.805 159.639,90.805 160.02,90.424 160.02,88.9 159.131,88.011 159.131,86.487 158.75,86.106 157.988,86.106 157.607,86.487 155.829,86.487 155.702,86.614 155.702,90.424
GND on Top Layer "GND_L01_P081" (solid, pour order 81): 156.337,108.585 160.147,108.585 160.401,108.331 160.401,106.807 159.512,105.918 159.512,105.41 159.258,105.156 157.988,105.156 156.337,105.156 156.083,105.41 156.083,108.331
HBRIN_HB1 on Top Layer "HBRIN_HB1_L01_P091" (solid, pour order 91): 144.272,67.564 142.494,67.564 142.494,67.818 142.113,68.199 140.462,68.199 139.827,68.834 138.553,68.834 137.918,69.469 135.636,69.469 135.636,69.977 136.779,69.977 137.033,70.231 137.033,70.612 137.16,70.739 138.684,70.739 139.192,71.247 144.018,71.247 144.272,70.993
GND_CAN on Top Layer "GND_CAN_L01_P106" (solid, pour order 106): 112.414,116.623 123.952,116.623 123.952,91.678 112.329,91.678
"5V PWR" on Top Layer "5V_PWR_L01_P094" (solid, pour order 94): 141.859,81.534 142.113,81.28 142.113,77.724 141.986,77.597 136.906,77.597 136.398,77.089 133.858,77.089 133.477,77.47 130.556,77.47 130.175,77.089 128.27,77.089 128.016,77.343 128.016,81.153 128.397,81.534
SW_4 on Top Layer "SW_4_L01_P093" (solid, pour order 93): 135.026,70.739 135.026,71.095 133.706,72.415 133.706,74.676 136.601,74.676 136.601,72.365 135.28,71.044 135.28,70.739
HBRIN_HB1 on Top Layer "HBRIN_HB1_L01_P092" (solid, pour order 92): 134.81,70.104 133.541,70.104 133.286,70.358 133.286,70.612 133.032,70.866 131.636,70.866 131.255,71.247 129.286,71.247 128.651,70.612 128.651,68.453 129.159,67.945 131,67.945 131.762,68.707 132.343,69.342 134.81,69.342
HBRIN_HB1 on Top Layer "HBRIN_HB1_L01_P087" (solid, pour order 87): 156.289,105.204 153.749,105.204 153.67,105.283 153.67,105.791 152.611,106.426 152.527,106.426 152.527,108.077 153.162,108.712 153.162,110.109 153.416,110.363 158.115,110.363 158.242,110.236 158.242,108.839 157.988,108.585 156.337,108.585 156.083,108.331 156.083,105.41
HBRIN_HB1 on Top Layer "HBRIN_HB1_L01_P086" (solid, pour order 86): 164.719,94.488 165.481,95.25 165.481,98.171 164.719,98.933 159.258,98.933 159.258,100.076 159.004,100.33 158.115,100.33 157.988,100.457 157.988,102.235 157.861,102.362 153.67,102.362 153.67,100.838 152.527,100.095 152.527,99.187 151.892,98.552 150.241,98.552 149.86,98.171 149.86,94.996 150.368,94.488
MOTOR2_HB1 on Top Layer "MOTOR2_HB1_L01_P083" (solid, pour order 83): 163.068,98.806 162.941,98.679 159.893,98.679 159.766,98.806 159.512,98.806 159.512,100.076 159.131,100.457 158.242,100.457 158.242,105.029 158.623,105.41 158.623,107.325 158.612,107.336 159.226,107.95 177.292,107.95 177.546,107.696 177.546,101.346 176.657,100.457 163.576,100.457 163.068,99.949
MOTOR1_HB2 on Top Layer "MOTOR1_HB2_L01_P082" (solid, pour order 82): 158.787,89.2 160.392,90.805 160.392,92.066 160.655,92.329 162.433,92.329 162.687,92.075 162.687,91.059 162.941,90.805 176.911,90.805 177.8,89.916 177.8,81.788 158.75,81.788 158.787,81.825 158.787,82.6
HBRIN_HB1 on Top Layer "HBRIN_HB1_L01_P070" (solid, pour order 70): 155.702,79.629 155.702,82.931 157.861,82.931 158.115,83.185 158.115,84.328 157.988,84.455 152.908,84.455 152.654,84.201 152.654,80.723 153.67,79.707 153.67,79.375 153.92,79.125 155.198,79.125
MOTOR2_HB2 on Top Layer "MOTOR2_HB2_L01_P068" (solid, pour order 68): 163.322,72.644 163.195,72.517 160.147,72.517 160.02,72.644 159.766,72.644 159.766,73.914 159.385,74.295 158.496,74.295 158.496,78.867 158.877,79.248 158.877,81.163 158.866,81.174 159.48,81.788 177.546,81.788 177.8,81.534 177.8,75.184 176.911,74.295 163.83,74.295 163.322,73.787
GND on Top Layer "GND_L01_P063" (solid, pour order 63): 155.956,82.677 159.639,82.677 160.02,82.296 160.02,81.407 159.131,80.518 159.131,78.994 158.75,78.613 157.988,78.613 157.607,78.994 155.829,78.994 155.702,79.121 155.702,82.423
NetJ200_2 on Top Layer "NETJ200_2_L01_P061" (solid, pour order 61): 177.673,65.278 177.673,57.404 177.419,57.404 176.784,56.769 141.097,56.769 141.097,57.785 145.796,62.484 145.796,63.5 146.304,64.008 164.846,64.008 166.116,65.278
GND on Bottom Layer "GND_L04_P099" (solid, pour order 99): 123.825,116.713 177.673,116.713 177.673,56.642 177.419,56.896 112.268,56.896 112.268,92.363 123.825,92.272
HBRIN_HB1 on Bottom Layer "HBRIN_HB1_L04_P059" (solid, pour order 59): 165.989,65.024 165.989,71.374 165.735,71.628 165.354,71.628 164.846,72.136 160.02,72.136 159.766,72.39 159.766,73.749 158.534,73.749 158.115,74.168 158.115,78.613 157.671,78.93 155.856,78.989 155.702,79.148 155.702,82.423 155.956,82.677 157.861,82.677 158.115,82.931 158.115,86.55 157.671,86.995 155.962,86.995 155.701,87.244 155.717,90.545 156.21,90.805 159.131,90.805 159.385,91.059 159.766,91.44 159.766,91.948 153.924,91.948 153.67,91.694 153.67,84.455 152.908,84.455 152.654,84.197 152.654,83.439 152.654,80.723 153.67,79.707 153.67,74.93 153.416,74.676 151.384,74.676 150.622,73.914 150.622,72.136 147.447,72.136 147.066,71.755 147.066,64.008 147.447,63.627 155.827,63.627 164.592,63.627
GND on Bottom Layer "GND_L04_P079" (solid, pour order 79): 154.051,113.03 153.67,113.411 153.67,116.332 154.051,116.713 160.528,116.713 160.782,116.459 160.782,114.935 159.766,113.919 159.766,112.522 159.131,111.887 158.115,111.887 158.115,112.776 157.861,113.03
LED3v3 on Bottom Layer "LED3V3_L04_P096" (solid, pour order 96): 139.065,78.74 139.7,79.375 142.113,79.375 142.494,79.756 142.494,81.28 142.113,81.661 142.113,83.797 139.827,87.122 140.344,87.639 142.303,89.599 143.129,89.599 144.907,87.82 144.907,81.28 146.431,79.756 147.574,79.756 147.574,76.708 142.621,76.708 142.113,77.216 139.827,77.216 139.065,77.978
HBRIN_HB1 on Bottom Layer "HBRIN_HB1_L04_P065" (solid, pour order 65): 159.766,91.948 159.766,92.329 158.877,93.218 158.877,94.488 159.385,94.996 165.989,94.996 166.37,95.377 166.37,98.298 166.243,98.425 159.385,98.425 159.004,98.806 159.004,99.822 158.75,100.076 158.242,100.076 158.115,100.203 158.115,104.902 157.988,105.029 156.21,105.029 155.956,105.283 155.956,108.331 156.21,108.585 157.988,108.585 158.115,108.712 158.115,112.776 157.861,113.03 154.051,113.03 153.67,112.649 153.67,108.712 152.527,108.077 152.527,106.468 153.67,105.833 153.67,100.838 152.527,100.076 151.194,100.013 151.257,98.298 151.257,96.012 152.527,94.742 153.67,93.793 153.67,91.694 159.512,91.694
GND_CAN on Bottom Layer "GND_CAN_L04_P107" (solid, pour order 107): 112.576,116.332 123.317,116.332 123.317,92.059 112.494,92.059
MOTOR1_HB1 on Bottom Layer "MOTOR1_HB1_L04_P078" (solid, pour order 78): 177.673,114.935 177.673,107.95 159.766,107.95 159.766,108.458 159.639,108.585 158.115,108.585 158.115,110.46 158.115,112.111 159.766,112.111 159.766,113.919 160.782,114.935 164.846,114.935 165.1,115.189 165.1,116.713 169.799,116.713 169.799,115.189 170.053,114.935 172.212,114.935 172.72,115.443 172.72,116.623 177.673,116.713
"5V PWR" on Bottom Layer "5V_PWR_L04_P095" (solid, pour order 95): 142.113,79.375 142.494,79.756 142.494,81.28 142.24,81.534 139.954,81.534 139.573,81.915 139.573,83.058 139.319,83.312 136.779,83.312 136.525,83.058 136.525,82.048 136.138,81.661 132.08,81.661 130.683,81.661 130.683,78.994 130.937,78.74 139.065,78.74 139.7,79.375
MOTOR2_HB1 on Bottom Layer "MOTOR2_HB1_L04_P077" (solid, pour order 77): 158.191,100.381 158.191,104.191 158.953,104.953 158.953,106.477 160.35,107.874 177.495,107.874 177.495,101.143 176.733,100.381 163.652,100.381 163.144,99.873 163.144,98.73 163.017,98.603 159.715,98.603 159.588,98.73 159.588,99.873 159.08,100.381
GND on Bottom Layer "GND_L04_P076" (solid, pour order 76): 156.21,108.712 158.115,108.712 158.369,108.458 159.893,108.458 160.02,108.331 160.02,107.315 159.893,107.315 159.131,106.553 159.131,105.091 158.69,104.649 158.241,104.649 157.866,105.024 156.11,105.024 156.11,105.029 155.956,105.183 155.956,108.458
MOTOR1_HB2 on Bottom Layer "MOTOR1_HB2_L04_P073" (solid, pour order 73): 160.02,90.805 159.766,91.059 159.766,91.948 160.147,92.329 163.068,92.329 163.322,92.075 163.322,90.932 163.576,90.678 177.165,90.678 177.673,90.17 177.673,81.788 159.766,81.788 159.766,82.296 159.639,82.423 158.115,82.423 158.115,86.233 158.75,86.868 158.75,89.154 159.004,89.408 160.02,89.408
GND on Bottom Layer "GND_L04_P072" (solid, pour order 72): 159.639,90.805 160.02,90.424 160.02,89.408 159.004,89.408 158.75,89.154 158.75,86.741 158.559,86.55 158.115,86.55 157.671,86.995 155.951,86.995 155.701,87.244 155.717,87.26 155.717,90.545 155.977,90.805
GND on Bottom Layer "GND_L04_P071" (solid, pour order 71): 155.956,82.677 157.861,82.677 158.115,82.423 159.639,82.423 159.766,82.296 159.766,81.28 159.639,81.28 158.877,80.518 158.877,79.056 158.436,78.614 157.987,78.614 157.612,78.989 155.856,78.989 155.856,78.994 155.702,79.148 155.702,82.423
MOTOR2_HB2 on Bottom Layer "MOTOR2_HB2_L04_P067" (solid, pour order 67): 158.369,74.295 158.369,78.105 159.131,78.867 159.131,80.391 160.528,81.788 177.673,81.788 177.673,75.057 176.911,74.295 163.83,74.295 163.322,73.787 163.322,72.644 163.195,72.517 159.893,72.517 159.766,72.644 159.766,73.787 159.258,74.295
NetJ200_2 on Bottom Layer "NETJ200_2_L04_P066" (solid, pour order 66): 141.097,57.785 145.796,62.484 146.558,63.246 148.082,63.246 161.798,63.246 161.798,63.754 161.925,63.881 171.196,63.881 171.45,63.627 171.45,62.865 171.196,62.611 171.196,61.595 177.292,61.595 177.546,61.341 177.546,57.277 177.165,56.896 141.097,56.896
GND on GND "GND_L02_P047" (solid, pour order 47): 123.694,91.379 123.694,116.579 175.392,116.579 cw(c175.392,114.04) 177.188,115.835 177.444,115.579 177.444,58.579 cw(c176.238,58.578) 177.091,57.725 176.944,57.579 112.644,57.579 112.644,91.379
GND_CAN on GND "GND_CAN_L02_P058" (solid, pour order 58): 112.8,116.2 123.2,116.2 123.2,92.8 112.72,92.8
GND on PWR "GND_L03_P104" (solid, pour order 104): 112.268,116.713 112.358,116.623 177.673,116.623 177.673,57.912 176.53,56.769 112.268,56.769
LED3v3 on PWR "LED3V3_L03_P097" (solid, pour order 97): 141.224,85.09 141.224,85.725 138.303,88.646 138.176,88.519 136.271,88.519 131.064,93.726 131.064,95.631 136.271,100.838 137.922,100.838 137.922,100.711 143.129,95.504 143.129,89.662 144.907,87.884 144.907,85.09
MOTOR1_HB1 on PWR "MOTOR1_HB1_L03_P100" (solid, pour order 100): 177.673,114.554 177.673,107.569 159.766,107.569 159.766,108.077 159.639,108.204 159.639,111.603 159.766,111.73 159.766,115.062 161.327,116.623 177.673,116.623
HBRIN_HB1 on PWR "HBRIN_HB1_L03_P090" (solid, pour order 90): 146.05,70.612 128.524,70.612 128.016,70.104 128.016,68.072 128.524,67.564 145.288,67.564 146.05,68.326
HBRIN_HB1 on PWR "HBRIN_HB1_L03_P089" (solid, pour order 89): 165.862,69.215 165.862,71.628 163.83,73.66 158.496,73.66 157.734,74.422 157.734,94.234 158.496,94.996 165.354,94.996 165.862,95.504 165.862,99.822 165.354,100.33 158.496,100.33 157.48,101.346 157.48,116.586 152.4,116.586 152.146,116.332 152.146,100.838 149.86,98.552 149.86,95.25 150.368,94.742 151.638,94.742 152.4,93.98 152.4,75.438 149.606,72.644 147.828,72.644 145.796,70.612 145.796,68.199 164.846,68.199
MOTOR2_HB2 on PWR "MOTOR2_HB2_L03_P103" (solid, pour order 103): 159.004,74.168 159.004,81.052 159.867,81.915 177.435,81.915 177.689,81.661 177.689,75.311 176.546,74.168
MOTOR1_HB2 on PWR "MOTOR1_HB2_L03_P102" (solid, pour order 102): 158.787,89.454 160.392,91.059 160.392,92.32 160.655,92.583 162.433,92.583 162.687,92.329 162.687,91.313 162.941,91.059 176.911,91.059 177.8,90.17 177.8,82.042 158.75,82.042 158.787,82.079 158.787,82.854
MOTOR2_HB1 on PWR "MOTOR2_HB1_L03_P101" (solid, pour order 101): 158.178,100.584 158.178,103.759 159.258,104.838 159.258,106.362 160.338,107.442 177.482,107.442 177.482,101.028 177.038,100.584
"5V PWR" on PWR "5V_PWR_L03_P098" (solid, pour order 98): 140.335,81.915 140.335,79.121 139.7,78.486 138.43,78.486 130.302,78.486 129.54,79.248 129.54,81.788 130.175,82.423 139.827,82.423
NetJ200_2 on PWR "NETJ200_2_L03_P062" (solid, pour order 62): 177.673,65.278 177.673,57.404 177.165,56.896 141.097,56.896 141.097,57.785 145.796,62.484 145.796,63.627 146.431,64.262 165.1,64.262 166.116,65.278

## Keep-outs
Keep-Out Layer:
  lines w0.254: 112.9,56.75 176.15,56.75 ; 113.4,56.75 cw(c113.4,57.9) 112.25,57.9 112.25,116.75 176.5,116.75 cw(c176.5,115.5) 177.75,115.5 177.75,58 cw(c176.5,58) 176.5,56.75

## Other copper
Top Layer:
  pour cut-out: 129.323,92.712 129.161,92.712 124.968,88.519 124.968,88.265 129.159,84.074 130.743,84.074 132.304,85.635 132.304,85.949 130.683,84.328 129.159,84.328 125.222,88.265 125.222,88.519 125.258,88.519 129.291,92.552
GND:
  pour cut-out: 160.02,89.154 160.02,80.899 159.318,80.197 159.318,74.396 177.266,74.396 177.546,74.676 177.419,74.803 177.419,89.154
  pour cut-out: 160.147,115.3 160.147,107.188 159.445,106.486 159.445,100.685 177.393,100.685 177.673,100.965 177.546,101.092 177.546,115.3

## Silkscreen, mask and mechanical layers (free items; w line width, h text height)
Top Overlay:
  lines w0.305: 131.75,59.4 132.004,59.4
  text "ODMTR" at 152.19,115.56 h1 r270
  text "1" at 121.246,115.004 h1.52 r90
  text "2" at 136.996,114.754 h1.52 r90
  text "CAN" at 119.254,109.496 h1.52 r270
  text "UART" at 133.4,103.9 h0.5 r180
  text "TX" at 128.75,102.75 h1.91 r270
  text "RX" at 128.25,95 h1.91 r270
  text "CAN TERM" at 125.75,84.486 h1.27 r180
  text "5V" at 125.531,80.5 h2.54 r270
  text "3V3" at 125.531,70.25 h2.54 r270
  text "PICKIT" at 125.5,61.521 h1.91
  text "+" at 162,58.21 h7.62
Bottom Overlay:
  drawing of 10 lines, arcs and shapes, not listed
  text "Petar Ubavic" at 143.996,109.754 h1.52
  text "Aleksandar Aleksic" at 147.996,107.254 h1.52
  text "Serbian made" at 151.275,68.691 h3.5

## Text inside footprints (layer, text, board x,y; h text height)
C808_HB1: Top Overlay "+" at 165.433,97.924 h1.02 r45
C808_HB2: Top Overlay "+" at 156.289,71.132 h1.02 r45
C809_HB1: Top Overlay "+" at 156.289,97.924 h1.02 r45
C809_HB2: Top Overlay "+" at 165.433,71.132 h1.02 r45